# Altium PCB Bellerophon.PcbDoc
Units mil, origin at the board's own origin, x right, y up, seen from the top; angles counter-clockwise.
Board outline 2775.59 x 7893.7 mil, 2 copper layers (Top Layer, Bottom Layer); 34 components, 13 nets, 125 pads, 8 vias.
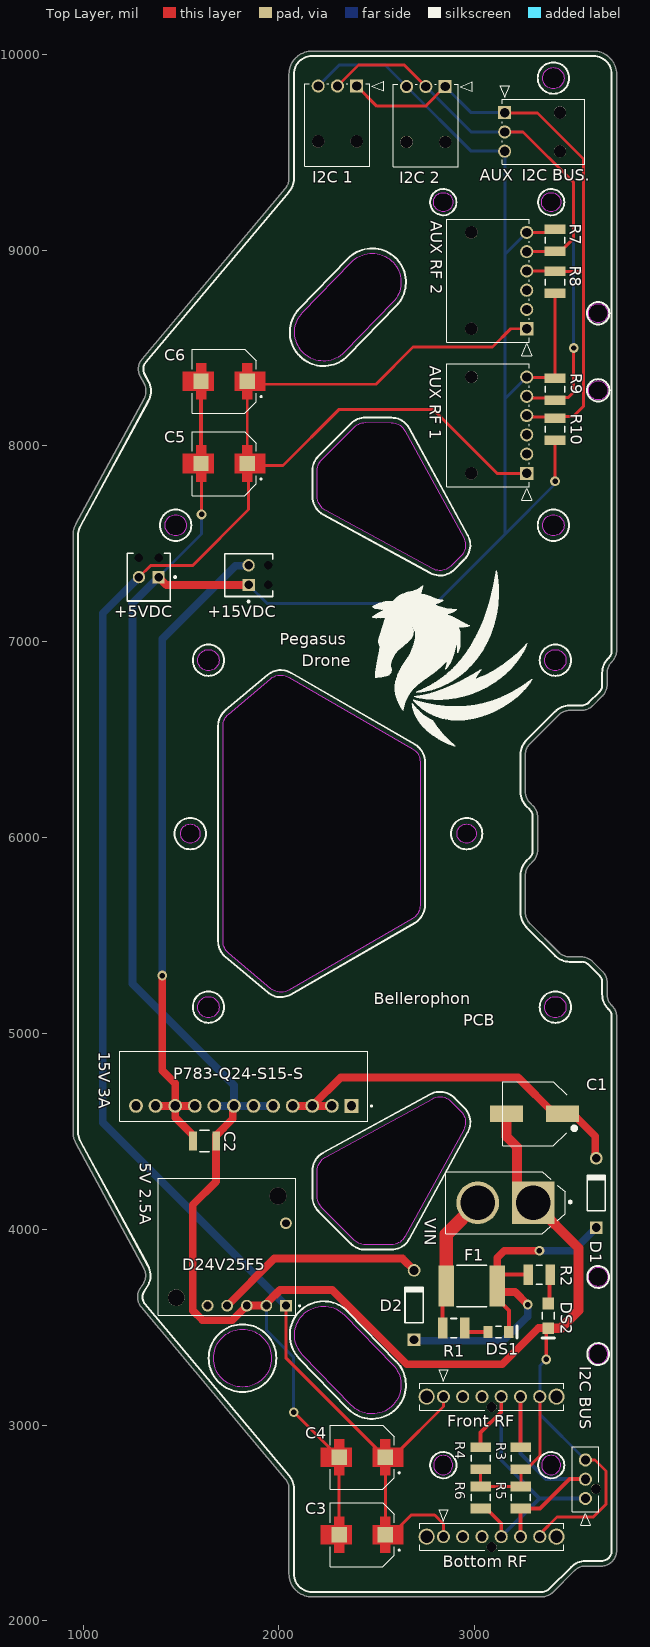
[diagram p0: Top Layer view]
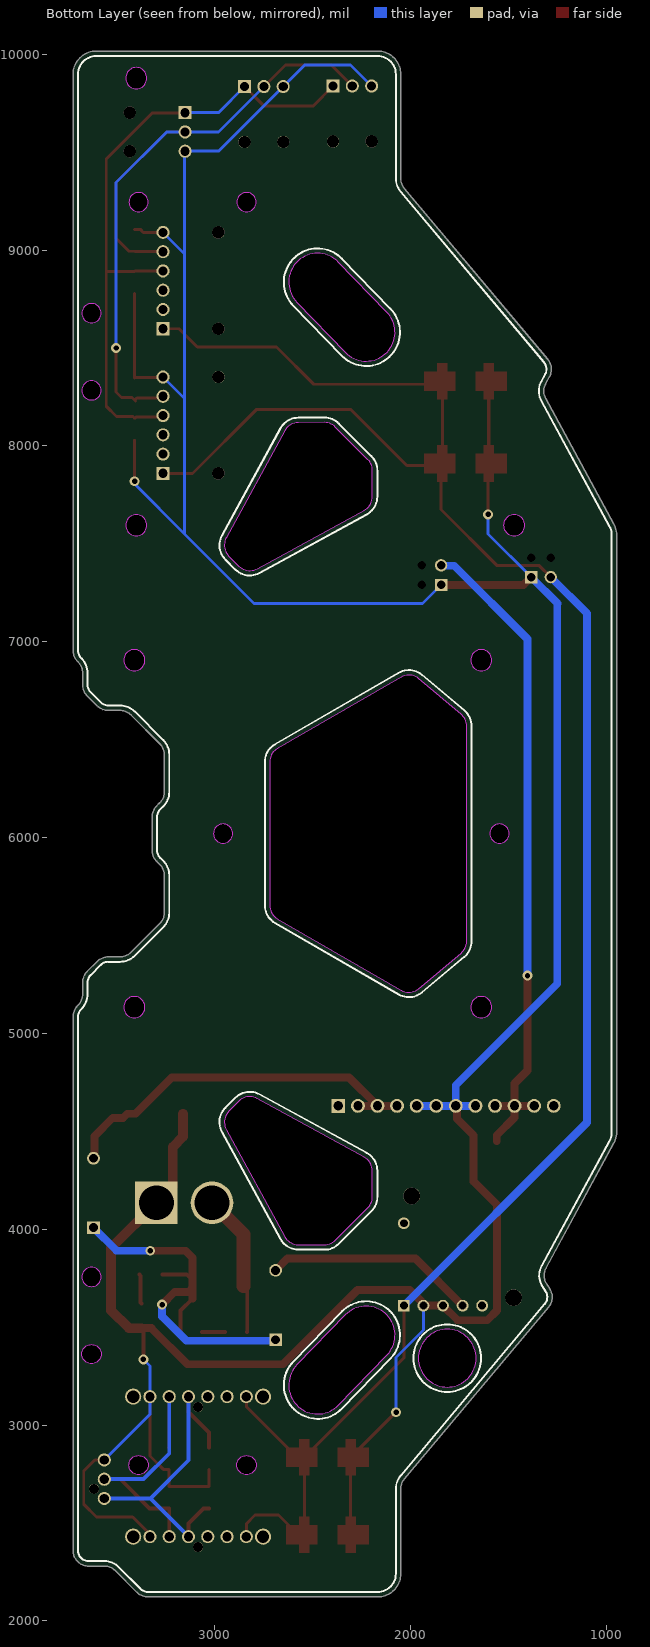
[diagram p1: Bottom Layer view, seen from below]

## Layer stack, top to bottom
Top Solder: solder mask 1, Solder Resist, Dk 3.5
Top Layer: signal copper 1.378
Dielectric 1: dielectric 12.6, FR-4, Dk 4.8
Bottom Layer: signal copper 1.378
Bottom Solder: solder mask 1, Solder Resist, Dk 3.5

## Board outline
1296.01,3602.82 cw(c1356.33,3653.44) 1290.29,3696.32 1306.14,3720.73 ccw(c1240.11,3763.62) 1309.3,3801.19 962.98,4439.04 cw(c1066.78,4495.4) 948.67,4495.4 948.67,7544.64 cw(c1066.78,7544.64) 962.98,7601 1311.26,8242.45 ccw(c1242.06,8280.02) 1311.26,8317.59 1291.41,8354.14 cw(c1360.61,8391.71) 1300.29,8442.33 2032.61,9315.06 ccw(c1972.29,9365.68) 2051.03,9365.68 2051.03,9897.97 cw(c2169.14,9897.97) 2169.14,10016.08 3606.15,10016.08 cw(c3606.15,9897.97) 3724.26,9897.97 3724.26,6954.6 cw(c3645.52,6954.6) 3701.19,6898.93 3698.89,6896.63 ccw(c3754.57,6840.95) 3675.83,6840.95 3675.83,6780.2 cw(c3597.09,6780.2) 3652.77,6724.52 3600.47,6672.22 cw(c3544.79,6727.9) 3544.79,6649.15 3484.04,6649.15 ccw(c3484.04,6570.42) 3428.36,6626.09 3281.57,6479.3 ccw(c3337.25,6423.63) 3258.51,6423.63 3258.51,6232.95 ccw(c3337.25,6232.95) 3281.57,6177.27 3297.65,6161.19 cw(c3241.97,6105.52) 3320.71,6105.52 3320.71,5934.53 cw(c3241.97,5934.53) 3297.65,5878.85 3281.57,5862.77 ccw(c3337.25,5807.09) 3258.51,5807.09 3258.51,5616.42 ccw(c3337.25,5616.42) 3281.57,5560.74 3428.36,5413.95 ccw(c3484.04,5469.63) 3484.04,5390.89 3544.79,5390.89 cw(c3544.79,5312.15) 3600.47,5367.82 3652.77,5315.52 cw(c3597.09,5259.85) 3675.83,5259.85 3675.83,5199.09 ccw(c3754.57,5199.09) 3698.89,5143.42 3701.19,5141.11 cw(c3645.52,5085.44) 3724.26,5085.44 3724.26,2358.6 cw(c3645.52,2358.6) 3645.52,2279.86 3564.94,2279.86 ccw(c3564.94,2201.12) 3509.27,2256.8 3397.91,2145.45 cw(c3342.23,2201.12) 3342.23,2122.38 2169.14,2122.38 cw(c2169.14,2240.49) 2051.03,2240.49 2051.03,2674.37 ccw(c1972.29,2674.37) 2032.61,2724.98
cut-out: 2789.52,2795.44 ccw(c2838.73,2795.44) 2838.73,2746.23 ccw(c2838.73,2795.44) 2887.94,2795.44 ccw(c2838.73,2795.44) 2838.73,2844.66 ccw(c2838.73,2795.44)
cut-out: 3340.7,2795.44 ccw(c3389.91,2795.44) 3389.91,2746.23 ccw(c3389.91,2795.44) 3439.12,2795.44 ccw(c3389.91,2795.44) 3389.91,2844.66 ccw(c3389.91,2795.44)
cut-out: 3411.46,5080.06 cw(c3411.46,5134.19) 3357.33,5134.19 cw(c3411.46,5134.19) 3411.46,5188.33 cw(c3411.46,5134.19) 3465.6,5134.19 cw(c3411.46,5134.19)
cut-out: 1639.81,5080.06 cw(c1639.81,5134.19) 1585.68,5134.19 cw(c1639.81,5134.19) 1639.81,5188.33 cw(c1639.81,5134.19) 1693.94,5134.19 cw(c1639.81,5134.19)
cut-out: 1546.91,5970.81 cw(c1546.91,6020.02) 1497.7,6020.02 cw(c1546.91,6020.02) 1546.91,6069.23 cw(c1546.91,6020.02) 1596.12,6020.02 cw(c1546.91,6020.02)
cut-out: 2958.38,5970.81 cw(c2958.38,6020.02) 2909.16,6020.02 cw(c2958.38,6020.02) 2958.38,6069.23 cw(c2958.38,6020.02) 3007.59,6020.02 cw(c2958.38,6020.02)
cut-out: 1639.81,6851.71 cw(c1639.81,6905.85) 1585.68,6905.85 cw(c1639.81,6905.85) 1639.81,6959.98 cw(c1639.81,6905.85) 1693.94,6905.85 cw(c1639.81,6905.85)
cut-out: 1472.29,7540.69 cw(c1472.29,7594.82) 1418.16,7594.82 cw(c1472.29,7594.82) 1472.29,7648.96 cw(c1472.29,7594.82) 1526.43,7594.82 cw(c1472.29,7594.82)
cut-out: 3411.46,6851.71 cw(c3411.46,6905.85) 3357.33,6905.85 cw(c3411.46,6905.85) 3411.46,6959.98 cw(c3411.46,6905.85) 3465.6,6905.85 cw(c3411.46,6905.85)
cut-out: 3401.43,7540.69 cw(c3401.43,7594.82) 3347.29,7594.82 cw(c3401.43,7594.82) 3401.43,7648.96 cw(c3401.43,7594.82) 3455.56,7594.82 cw(c3401.43,7594.82)
cut-out: 3630.17,8234.59 cw(c3630.17,8283.8) 3580.95,8283.8 cw(c3630.17,8283.8) 3630.17,8333.01 cw(c3630.17,8283.8) 3679.38,8283.8 cw(c3630.17,8283.8)
cut-out: 3630.17,8628.29 cw(c3630.17,8677.5) 3580.95,8677.5 cw(c3630.17,8677.5) 3630.17,8726.72 cw(c3630.17,8677.5) 3679.38,8677.5 cw(c3630.17,8677.5)
cut-out: 2838.73,9195.39 cw(c2838.73,9244.6) 2789.52,9244.6 cw(c2838.73,9244.6) 2838.73,9293.81 cw(c2838.73,9244.6) 2887.94,9244.6 cw(c2838.73,9244.6)
cut-out: 3389.91,9195.39 cw(c3389.91,9244.6) 3340.7,9244.6 cw(c3389.91,9244.6) 3389.91,9293.81 cw(c3389.91,9244.6) 3439.12,9244.6 cw(c3389.91,9244.6)
cut-out: 3401.43,9824.15 cw(c3401.43,9878.29) 3347.29,9878.29 cw(c3401.43,9878.29) 3401.43,9932.42 cw(c3401.43,9878.29) 3455.56,9878.29 cw(c3401.43,9878.29)
cut-out: 2218.64,4109.98 cw(c2274.32,4165.66) 2195.58,4165.9 2195.99,4299.18 cw(c2274.73,4298.94) 2236.95,4368.03 2784.04,4667.17 cw(c2821.82,4598.09) 2877.5,4653.76 2928.87,4602.39 cw(c2873.19,4546.72) 2942.27,4508.94 2643.13,3961.85 cw(c2574.04,3999.63) 2574.29,3920.89 2441,3920.48 cw(c2440.76,3999.22) 2385.08,3943.54
cut-out: 2195.99,7740.86 2195.58,7874.14 cw(c2274.32,7874.38) 2218.64,7930.06 2385.08,8096.5 cw(c2440.76,8040.82) 2441,8119.56 2574.29,8119.16 cw(c2574.04,8040.42) 2643.13,8078.19 2942.27,7531.1 cw(c2873.19,7493.33) 2928.87,7437.65 2877.5,7386.28 cw(c2821.82,7441.96) 2784.04,7372.87 2236.95,7672.01 cw(c2274.73,7741.1)
cut-out: 1742.6,5409.78 cw(c1793.22,5470.1) 1714.48,5470.1 1714.48,6569.94 cw(c1793.22,6569.94) 1742.6,6630.26 1958.75,6811.63 cw(c2009.37,6751.31) 2048.74,6819.5 2680.95,6454.5 cw(c2641.58,6386.31) 2720.32,6386.31 2720.32,5653.74 cw(c2641.58,5653.74) 2680.95,5585.55 2048.74,5220.54 cw(c2009.37,5288.73) 1958.75,5228.41
cut-out: 3580.95,3362.54 ccw(c3630.17,3362.54) 3630.17,3313.33 ccw(c3630.17,3362.54) 3679.38,3362.54 ccw(c3630.17,3362.54) 3630.17,3411.75 ccw(c3630.17,3362.54)
cut-out: 3630.17,3707.03 cw(c3630.17,3756.24) 3580.95,3756.24 cw(c3630.17,3756.24) 3630.17,3805.45 cw(c3630.17,3756.24) 3679.38,3756.24 cw(c3630.17,3756.24)
cut-out: 2369.51,3101.42 2121.92,3356.72 cw(c2227.91,3459.51) 2333.89,3562.29 2581.48,3306.99 cw(c2475.5,3204.21)
cut-out: 1813.71,3193.9 cw(c1813.71,3341.54) 1666.07,3341.54 cw(c1813.71,3341.54) 1813.71,3489.17 cw(c1813.71,3341.54) 1961.34,3341.54 cw(c1813.71,3341.54)
cut-out: 2333.89,8477.75 cw(c2227.91,8580.54) 2121.92,8683.32 2369.51,8938.62 cw(c2475.5,8835.84) 2581.48,8733.05

## Design rules (kind name [scope] priority, off if disabled: settings)
Clearance [All] p1: gap=6 ignorepadtopadclearanceinfootprint=FALSE
PolygonConnect [All] p1: connectstyle=Relief reliefconductorwidth=10 reliefentries=4 polygonreliefangle="90 Angle" airgapwidth=10
RoomDefinition Bellerophon [InComponentClass('Bellerophon')] p1: confinementstyle=ConfineIn formatcopy=TRUE lockcomponents=FALSE outline 3770,2180 4180,2180 4180,2515 3770,2515
RoutingVias [All] p1: holewidth=28 width=50 viastyle="Through Hole" minholewidth=28 minwidth=50 maxholewidth=28 maxwidth=50
SolderMaskExpansion [All] p1: expansion=4 istentingtop=FALSE
Width [All] p1: maxlimit=80 minlimit=6 preferedwidth=20 minimp=50.000000 maximp=50.000000 favimp=50.000000
30 further rules are at their usual default settings.

## Components (designator, comment, footprint, x,y, rotation, side; value= is the part's Value field where it differs from the comment)
"5V 2.5A" "D24V25F5" XDCR_12V_2.2A_STEP-DOWN_D24V22F12 1735,3910 r180 top
"15V 3A" "P783-Q24-S15-S" CONV_P783-Q24-S15-S 1820,4730.2 r180 top
+5VDC "Screw Terminal 2" PHOE-1725656-2 1335,7330 r180 top
+15VDC "Screw Terminal 1" PHOE-1725656-2 1845,7340 r90 top
"AUX RF 1" "1053131306" CON_1053131306 3265,7859.72 r270 top
"AUX RF 2" "1053131306" CON_1053131306 3265,8598.15 r270 top
"Bottom RF" "1053111306" CON_1053111306_MOL 2839.72,2430 r0 top
C1 "100μF/50V" CAPAE830X1020N 3305,4590 r180 top
C2 "22μF/25V" FP-1210-L_3_3_0_4-W_2_5_0-MFG 1620,4450 r0 top
C3 "EEEFN0J681V" CAP_EEEFN0J681V 2425,2440 r180 top
C4 "EEEFN0J681V" CAP_EEEFN0J681V 2425,2835 r180 top
C5 "EEEFN0J681V" CAP_EEEFN0J681V 1720,7910 r180 top
C6 "EEEFN0J681V" CAP_EEEFN0J681V 1720,8330 r180 top
D1 "1N4001-T" DIOD-DO-41-P-2_V 3620,4185 r90 top
D2 "1N4001-T" DIOD-DO-41-P-2_V 2690,3612.83 r90 top
DS1 "SML-LX1206IC-TR" LUMX-SML-LX1206IC_V 3120,3475 r0 top
DS2 "SML-LX1206GC-TR" LUMX-SML-LX1206GC-TR_V 3375,3557.68 r270 top
F1 "2920L300/15DR" FP-2920L-MFG 2984.55,3710 r0 top value=0.015-0.048Ω
"Front RF" "1053111306" CON_1053111306_MOL 2839.72,3145 r0 top
"I2C 1" "1053131303" CON_1053131303 2396.85,9837.68 r0 top (schematic designator "AUX I2C 1")
"I2C 2" "1053131303" CON_1053131303 2848.43,9835 r0 top (schematic designator "AUX I2C 2")
"I2C BUS" "1053091303" CON_1053091303 3565,2625 r90 top
"I2C BUS." "1053131303" CON_1053131303 3152.32,9701.85 r90 top
R1 "1K" RESC3225X70X50NL20T20 2892.09,3494.75 r0 top
R2 "1K" RESC3225X70X50NL20T20 3329.66,3767.81 r0 top
R3 "4.7k" RESC3225X70X50NL20T20 3235,2830 r270 top
R4 "4.7k" RESC3225X70X50NL20T20 3030,2830 r270 top
R5 "4.7k" RESC3225X70X50NL20T20 3235,2630 r90 top
R6 "4.7k" RESC3225X70X50NL20T20 3030,2630 r90 top
R7 "4.7k" RESC3225X70X50NL20T20 3410,9050 r90 top
R8 "4.7k" RESC3225X70X50NL20T20 3410,8835 r270 top
R9 "4.7k" RESC3225X70X50NL20T20 3410,8290 r90 top
R10 "4.7k" RESC3225X70X50NL20T20 3410,8085 r270 top
VIN "XT60-M" AMASS_XT60-M 3156.73,4135 r180 top

## Footprints (in the part's own frame and the unit in brackets; to place one, negate y for a bottom-side part, rotate by r counter-clockwise, add the part's x,y. Pads: shape width x height; smd on the part's side, far side on the other; paste and mask are expansions set on the pad)
AMASS_XT60-M [mm]
  rect 5.516x5.516 hole 4.5: 1(-3.6,0)
  round 5.516 hole 4.5: 2(3.6,0)
  silkscreen extent -8.55,-4.05 7.75,4.05
CAP_EEEFN0J681V [mm]
  rect 2x2 smd paste-2 mask+0: 1(-3,0) 2(3,0)
  Top Layer region: -2.35,1.25 -1.35,1.25 -1.35,-1.25 -2.35,-1.25 -2.35,-2.35 -3.65,-2.35 -3.65,-1.25 -5.35,-1.25 -5.35,1.25 -3.65,1.25 -3.65,2.35 -2.35,2.35
  Top Layer region: 3.65,1.25 5.35,1.25 5.35,-1.25 3.65,-1.25 3.65,-2.35 2.35,-2.35 2.35,-1.25 1.35,-1.25 1.35,1.25 2.35,1.25 2.35,2.35 3.65,2.35
  silkscreen extent -4.9,-4.15 4.15,4.15, body extent -4.85,-4.15 4.85,4.15, height 10.5
CAPAE830X1020N [mm]
  rect 4.25x2.1 smd: 1(-3.62,0) 2(3.62,0)
  silkscreen extent -5.44,-4.15 4.15,4.15
CON_1053091303 [mm]
  round 1.7 hole 1.2 mask+0.076: 1(0,0) 2(2.5,0) 3(5,0)
  round 1.3 hole 1.3 unplated mask+0.076: 4(1.25,-1.34)
  silkscreen extent -3.5,-1.74 6.72,1.74, body extent 0,0 0.25,0.25, height 0.25
CON_1053111306_MOL [mm]
  round 1.7 hole 1.2 mask+0.076: 1(0,0) 2(2.5,0) 3(5,0) 4(7.5,0) 5(10,0) 6(12.5,0)
  round 1.3 hole 1.3 unplated mask+0.076: 9(6.25,-1.34)
  round 2.1 hole 1.6 mask+0.076: P1(-2.17,0) P2(14.67,0)
  silkscreen extent -3.08,-1.74 15.58,3.52, body extent 0,0 0.25,0.25, height 0.25
CON_1053131303 [mm]
  rect 1.7x1.7 hole 1.2 mask+0.076: 1(0,0)
  round 1.7 hole 1.2 mask+0.076: 2(-2.5,0) 3(-5,0)
  round 1.6 hole 1.6 unplated mask+0.076: 4(0,-7.18) 5(-5,-7.18)
  silkscreen extent -6.72,-10.38 3.5,0.64, body extent 0,0 0.25,0.25, height 0.25
CON_1053131306 [mm]
  rect 1.7x1.7 hole 1.2 mask+0.076: 1(0,0)
  round 1.7 hole 1.2 mask+0.076: 2(-2.5,0) 3(-5,0) 4(-7.5,0) 5(-10,0) 6(-12.5,0)
  round 1.6 hole 1.6 unplated mask+0.076: 7(0,-7.18) 8(-12.5,-7.18)
  silkscreen extent -14.22,-10.38 3.5,0.64, body extent 0,0 0.25,0.25, height 0.25
CONV_P783-Q24-S15-S [mm]
  rect 1.8x1.8 hole 1.2: 1(-13.97,2.545)
  round 1.8 hole 1.2: 2(-11.43,2.545) 3(-8.89,2.545) 4(-6.35,2.545) 5(-3.81,2.545) 6(-1.27,2.545) 7(1.27,2.545) 8(3.81,2.545) 9(6.35,2.545) 10(8.89,2.545) 11(11.43,2.545) 12(13.97,2.545)
  silkscreen extent -16.68,-4.52 16.07,4.52
DIOD-DO-41-P-2_V [mm] "2-Leads, Axial Lead, Body 4.635x2.36mm, Pin Spacing 9mm"
  rect 1.65x1.65 hole 1.15: 1(-4.5,0)
  round 1.65 hole 1.15: 2(4.5,0)
  silkscreen extent -2.32,-1.18 2.32,1.18, body extent -4.93,-1.18 4.93,1.18, height 2.35
FP-1210-L_3_3_0_4-W_2_5_0-MFG [mm]
  rect 1x2.5 smd paste+0 mask+0: 1(-1.5,0) 2(1.5,0)
  silkscreen extent -0.62,-1.4 0.62,1.4, body extent -2.1,-1.5 2.1,1.5, height 0.25
FP-2920L-MFG [mm]
  rect 2x5.3 smd paste+0 mask+0: 1(-3.3,0) 2(3.3,0)
  silkscreen extent -1.92,-2.72 1.92,2.72, body extent -4.4,-2.82 4.4,2.82, height 0.25
LUMX-SML-LX1206GC-TR_V [mm] "SMD, 2-Leads, Body 3.2x1.6mm"
  rect 1.5x1.5 smd: 1(-1.6,0) 2(1.6,0)
  silkscreen extent -0.45,-0.8 2.85,0.8, body extent -1.6,-0.8 1.6,0.8, height 1.1
LUMX-SML-LX1206IC_V [mm] "SMD, 2-Leads, Body 3.2x1.5mm"
  rect 1.2x1.5 smd: 1(-1.35,0) 2(1.35,0)
  silkscreen extent -0.35,-0.75 2.45,0.75, body extent -1.6,-0.8 1.6,0.8, height 1.1
PHOE-1725656-2 [mm] "Connector, 2-Leads, Body 6.2x5.4mm, Pitch 2.54mm"
  rect 1.6x1.6 hole 1.1: 1(-1.27,0)
  round 1.6 hole 1.1: 2(1.27,0)
  round 0 hole 1.1 unplated: MH1(-1.27,-2.54) MH2(1.27,-2.54)
  silkscreen extent -3.55,-3.1 2.77,3.1, body extent -2.77,-3.1 2.77,3.1, height 9
RESC3225X70X50NL20T20 [mm] "Chip Resistor, 2-Leads, Body 3.20x2.50mm, IPC Medium Density"
  rect 1.25x2.7 smd: 1(-1.425,0) 2(1.425,0)
  silkscreen extent -0.4,-1.25 0.4,1.25, body extent -1.7,-1.35 1.7,1.35, height 0.7
XDCR_12V_2.2A_STEP-DOWN_D24V22F12 [mm]
  rect 1.53x1.53 hole 1.02: 1(-7.63,7.63)
  round 1.53 hole 1.02: 2(-5.09,7.63) 3(-2.55,7.63) 4(-0.01,7.63) 5(2.53,7.63) 6(-7.63,-3.06)
  round 2.18 hole 2.18 unplated: ""(-6.6,-6.6) ""(6.6,6.6)
  silkscreen extent -9.5,-8.9 8.9,8.9

## Part data
"5V 2.5A": library part 12V_2.2A_STEP-DOWN_D24V22F12, "Converter: step down; Uin: 12.7Ã·36V; Uout: 12V; 2200mA; 90Ã·95%", Package=None, Availability=Unavailable, MF=Pololu, MP="12V 2.2A STEP-DOWN D24V22F12", Price=None, SnapEDA_Link=https://www.snapeda.com/parts/12V%202.2A%20STEP-DOWN%20D24V22F12/Pololu/view-part/1771637/?ref=snap
"15V 3A": Package=None, Availability=Unavailable, MP=P783-Q24-S15-S, Price=None
+5VDC +15VDC: library part CMP-2000-05299-1, "Male Header, Pitch 2.54 mm, 1 x 2 Position, Height 9 mm, Tail Length 3.5 mm", Colour=Green, Manufacturer="Phoenix Contact", Manufacturer part No.=1725656, Content=250pc(s), Datasheet URL=http://datasheet.octopart.com/1725656-Phoenix-Contact-datasheet-5302866.pdf, Datasheet Version=Apr-08, Industrial packaging=Yes, Manufacturer URL=http://www.phoenixcontact.com/, Number of contacts=2, Pitch=2.54mm, Type=MPT0,5/2-2,54
"AUX RF 1" "AUX RF 2" "Bottom RF" "Front RF" "I2C 1" "I2C 2" "I2C BUS" "I2C BUS.": "No Description Available", Mfr_Name="Molex Connector Corporation", Copyright="Copyright (C) 2022 Ultra Librarian. All rights reserved.", RefDes=RefDes, Type=DEV
  "AUX RF 1" "AUX RF 2": Digi-Key_Part_Number_1=WM15145-ND, Manufacturer_Part_Number=1053131306
  "Bottom RF" "Front RF": Digi-Key_Part_Number_1=WM15093-ND, Manufacturer_Part_Number=1053111306
  "I2C 1" "I2C 2" "I2C BUS.": Digi-Key_Part_Number_1=WM15142-ND, Manufacturer_Part_Number=1053131303
  "I2C BUS": Digi-Key_Part_Number_1=WM15037-ND, Manufacturer_Part_Number=1053091303
C1: library part EDK107M050A9MAA, "100ÂµF 50V Aluminum Electrolytic Capacitors Radial, Can - SMD 2000 Hrs @ 85Â°C", Package="Radial Kemet", Availability=Unavailable, MF=KEMET, MP=EDK107M050A9MAA, Price=None, SnapEDA_Link=https://www.snapeda.com/parts/EDK107M050A9MAA/KEMET/view-part/285947/?ref=snap
C2: library part CMP-2000-05483-2, "General Purpose Ceramic Capacitor, 1210, 22uF, 10%, X5R, 15%, 16V", Capacitance=22uF, Case Code (Imperial)=1210, Case Code (Metric)=3225, Dielectric=X5R, Max Operating Temperature=85°C, Min Operating Temperature=-55°C, Package Quantity=1, Tolerance=10%, Voltage=16V, Case/Package=1210, Construction=Flat, Contact Plating=Tin, Depth=2.5mm, Height=2.79mm, Lead Free="Lead Free", Length=3.2mm, Mount="Surface Mount", Number of Pins=2, Packaging="Tape and Reel", Radiation Hardening=No, REACH SVHC="No SVHC", RoHS Compliant=Yes, Series=-, Size=2.79mm, Termination=SMD/SMT, Thickness=0.11inch, Voltage Rating=16V, Voltage Rating (DC)=16V, Weight=0.000564oz, Width=0.098inch
C3 C4: Package=CAP_EEEFN0J681V, DeviceSetName=EEEFN0J681V, Digi-Key_Part_Number=10-EEE-FN0J681VCT-ND, GateName_1=G$1, LibraryName=EEEFN0J681V, MF=Panasonic, MP=EEEFN0J681V, Purchase-URL=https://pricing.snapeda.com/search/part/EEEFN0J681V/?ref=eda, SymbolName_1=EEEFN0J681V
C5 C6: "CAP ALUM 680UF 20% 6.3V SMD", Package="RADIAL-2 Panasonic", Availability="In Stock", Check_prices=https://www.snapeda.com/parts/EEEFN0J681V/Panasonic/view-part/?ref=eda, MF=Panasonic, MP=EEEFN0J681V, Price=None, Purchase-URL=https://pricing.snapeda.com/search/part/EEEFN0J681V/?ref=eda, SnapEDA_Link=https://www.snapeda.com/parts/EEEFN0J681V/Panasonic/view-part/?ref=snap
D1 D2: library part CMP-0639-00006-2, "1.0 A Rectifier, 15 pF, 50 V, -65 to 150 degC, 2-Pin DO-41 Plastic, RoHS, Tape and Reel", Manufacturer="Diodes Inc", Max. Average Rectified Current IO (A)=1, Operating Temperature Range (degC)="-65 to 150", ComponentLink1Description="Manufacturer URL", ComponentLink1URL=http://diodes.com/, ComponentLink2Description=Datasheet, ComponentLink2URL=http://diodes.com/datasheets/ds28002.pdf, CT (pF)=15, DatasheetVersion="Rev. 8-2", Max. IFSM (A)=30, Max. IR (uA)=5, Mounting Technology="Through Hole", PackageDescription="2-Pin Axial Lead, Body 4.635 x 2.36 mm, Lead Spread 25.4 mm", PackageReference=DO-41-P-2, Packing="Tape and Reel", PartNumber=1N4001-T, RoHS=TRUE, VF (V)=1, VRRM (V)=50
DS1: library part CMP-2000-07123-1, "LED Red, 65 mW, -40 to 85 degC, 2-Pin SMD, RoHS, Tape and Reel", Color=Red, Manufacturer=Lumex, Operating Temperature=-25to85C, Package Description="2-Pin Surface Mount Device, Body 3.2 x 1.5 mm", Package Reference=SML-LX1206IC, Reverse Voltage=5(Min)V, Supplier_Package=SMD, Datasheet URL=http://www.lumex.com/content/files/ProductAttachment/SML-LX1206IC-TR.pdf, Datasheet Version="Rev. J, 08/2012", Dimension=3.2x1.6x1.1mm, Dominant Wavelength=N/A, ECCN=EAR99, Family=SML-LX1206IC, HTS=8541402000, Intensity=6mcd, LED Material=GaAsP, Lens Appearance=ColorlessNonDiffused, Lens Dimensions=2x1.6x0.5mm, Manufacturer URL=http://www.lumexinstruments.com/, Mounting=SurfaceMount, Mounting Technology=SurfaceMount, Number of LEDs=1, Packaging=TapeandReel, Part No=SML-LX1206IC-TR, Peak Wavelength=635nm, Pin_Count=2, RoHS=Unknown, Supplier=Lumex, Supplier Standard Pack=3,000, Type=Uni-Color, Viewing Angle=160
DS2: library part CMP-2000-07122-1, "Green Led, Water Clear Lens, 10 mcd, 565 nm, 2.2 V, -40 to 85 degC, 2-Pin SMD, RoHS, Tape and Reel", Color=Green, Manufacturer=Lumex, Operating Temperature=-40to85C, Package Description="2-Pin Surface Mount Device, Body 3.2 x 1.6 mm", Reverse Voltage=5(Min)V, Supplier_Package=SMD, COO=CN, Datasheet URL=http://www.mouser.com/ds/2/244/SML-LX1206GC-TR-112732.pdf, Datasheet Version="Rev. J, 04/2011", Dimension=3.2x1.6x1.1mm, Dominant Wavelength=N/A, ECCN=EAR99, Family=SML-LX1206GC, HTS=8541402000, Intensity=10mcd, LED Material=GaP, Lens Appearance=ColorlessNonDiffused, Lens Dimensions=2x1.6x0.5mm, Manufacturer URL=http://www.lumexinstruments.com/, Mounting=SurfaceMount, Mounting Technology=SurfaceMount, Number of LEDs=1, Package Reference=SML-LX1206GC-TR, Packaging=TapeandReel, Part No=SML-LX1206GC-TR, Peak Wavelength=565nm, Pin_Count=2, RoHS=Yes, Supplier=Lumex, Supplier Standard Pack=3,000, Type=Uni-Color, Viewing Angle=160
F1: library part CMP-2000-05550-2, "PTC RESET FUSE 15V 3A 2920", Ambient Temperature Range High=+85°C, Ambient Temperature Range Low=-40°C, Current Rating=40A, Hold Current=3A, Manufacturer=Littelfuse, Package=2920L, Resistance=0.015-0.048Ω, Temperature="-40°C to +85°C", Trip Current=5A, Voltage Rating=15V, Automotive=No, Category=Fuse, ComponentLink2Description=Datasheet, ComponentLink2URL=https://m.littelfuse.com/~/media/electronics/datasheets/resettable_ptcs/littelfuse_ptc_2920l_datasheet.pdf.pdf, Device Class L1="Circuit Protection", Device Class L2="PTC Resettable Fuses", Device Class L3=unset, Digikey Description="PTC RESET FUSE 15V 3A 2920", Height=1.25mm, Lead Free=Yes, Manufacturer Part Number=2920L300/15DR, Octopart=https://octopart.com/2920l300%2F15dr-littelfuse-673797, RoHS=TRUE, Temperature Range High=+85°C, Temperature Range Low=-40°C, Trip Time=20s
R1 R2 R3 R4 R5 R6 R7 R8 R9 R10: library part CMP-2005-03583-1, Manufacturer=Panasonic, Part Number=ERJ-14YJ472U
VIN: "Plug; DC supply; XT60; male; PIN: 2; for cable; soldered; 30A; 500V", Package="Package Analog Devices", Availability=Unavailable, MF=AMASS, MP=XT60-M, Price=None, SnapEDA_Link=https://www.snapeda.com/parts/XT60-M/AMASS/view-part/2883912/?ref=snap

## Via types
v1: diameter 50, hole 28, Top Layer to Bottom Layer, 8 vias

## Nets (pads, with @x,y where several pads share a name; then routed paths per layer and width w, separated by ;. In a path a pad name is that pad's centre, name@x,y a point inside that pad or via, vN(x,y) a via of type N, cw(c..) or ccw(c..) an arc to the next point about the centre after c; other vN are vias at no path point)
+5V: "5V 2.5A.1" "AUX RF 1.1" "AUX RF 2.1" "Bottom RF.1" "Front RF.1" +5VDC.2 C3.1 C4.1 C5.1 C6.1 | length 11000.6
  Top Layer w15: +5VDC.2 1343.35,7388.35 1558.35,7388.35 1845,7675 1845,7893.11 1838.11,7900 2020,7900 2305,8185 2789.29,8185 3114.57,7859.72 3265,7859.72 ; C5.1 1838.11,8315 2495,8315 2685,8505 3090,8505 3183.15,8598.15 3265,8598.15 ; 2035.39,3609.61 2035,3609.21 2035,3343.11 C4.1 ; 2839.72,2430 2839.72,2495.28 2795,2540 2675,2540 2596.19,2461.19 2564.3,2461.19 C3.1 C4.1 ; 2839.72,3145 2839.72,3094.72 2596.19,2851.19 2559.3,2851.19 C4.1
  Bottom Layer w40: +5VDC.2 1100,7145 1100,4545 2035.39,3609.61
+15V: "15V 3A.9" "15V 3A.10" "15V 3A.11" +15VDC.2 C2.1 | length 3430
  Top Layer w20: +15VDC.2@1842.5,7392.5 +15VDC.2
  Top Layer w40: 1370,4630 1470,4630 ; v1(1403.89,5295) 1403.89,4810 1470,4743.89 1470,4630 ; C2.1 1560.95,4479.06 1470,4570 1470,4630 ; 1570,4630 1470,4630
  Bottom Layer w40: v1(1403.89,5295) v1@1405.28,5296.39 ; v1@1403.89,5296.39 1403.89,6946.81 1403.89,7013.89 1777.8,7387.8 1842.8,7387.8 +15VDC.2
+22V: D1.1 D2.1 DS1.2 F1.2 R2.1 | length 2022.4
  Top Layer w20: F1.2@3114.47,3645.04 3175,3584.51 DS1.2@3175,3475 ; F1.2@3114.47,3738.44 3143.84,3767.81 R2.1@3268.9,3767.81
  Top Layer w40: F1.2@3114.47,3645.04 F1.2@3114.47,3699.37 ; v1(3270,3615) 3205,3680 3133.84,3680 F1.2@3114.47,3699.37 ; v1(3330,3890) 3150,3890 3114.47,3854.47 3114.47,3738.44 F1.2 F1.2@3114.47,3699.37
  Bottom Layer w40: D2.1@2690,3430 3145,3430 3270,3555 v1(3270,3615) ; v1(3330,3890) 3502.17,3890 D1.1
GND: "5V 2.5A.2" "5V 2.5A.3" "15V 3A.5" "15V 3A.6" "15V 3A.7" "15V 3A.8" "AUX RF 1.6" "AUX RF 2.6" "Bottom RF.6" "Front RF.6" "I2C 1.3" "I2C 2.3" "I2C BUS.3" "I2C BUS..3" +5VDC.1 +15VDC.1 C1.2 C2.2 C3.2 C4.2 C5.2 C6.2 DS2.2 R3.2 R4.2 R5.2 R6.2 R7.2 R8.2 R9.2 R10.2 VIN.1 | length 19332.6
  Top Layer w15: v1(1605,7650) C5.2@1605,7896.89 ; v1(2075,3065) 2076.89,3065 C4.2 C3.2 ; R4.2 R6.2 R5.2 R3.2 3263.54,2773.9 3331.85,2842.2 3331.85,3145 ; 3265,8351.85 3267.87,8348.98 3407.13,8348.98 R9.2 R8.2 ; 3265,9090.28 3365.63,9090.28 3381.46,9106.1 R7.2 ; 3331.85,2430 3331.85,2441.85 3420,2530 3605,2530 3670,2595 3670,2765 3613.15,2821.85 3565,2821.85 ; v1(3410,7820) R10.2
  Top Layer w20: C6.2@1601.89,8315 1601.89,7900 C5.2@1605,7896.89 ; v1(3365,3335) 3365,3484.68 DS2.2
  Top Layer w40: +5VDC.1 1425,7290 +15VDC.1 ; 1770,4630 1764.09,4624.09 1764.09,4563.94 1679.05,4478.9 C2.2 1679.05,4244.05 1560,4125 1560,3585 1610,3535 1760.79,3535 1835.39,3609.61 1935.39,3609.61 1935.39,3615.08 1945.51,3625.2 1945.51,3630.51 2005,3690 2272.42,3690 2652.42,3310 3140,3310 3324.68,3494.68 DS2.2
  Top Layer w50: C1.2 3162.48,4472.52 3214.88,4420.12 ; 3214.88,4415 3214.88,4218.58 VIN.1 3530,3903.46 3530,3585 3439.68,3494.68 DS2.2
  Bottom Layer w15: +5VDC.1 1605,7550 v1(1605,7650) ; +15VDC.1 1940,7195 2800,7195 3155,7550 ; 1935.39,3609.61 1935.39,3484.61 2075,3345 v1(2075,3065) ; 2200,9837.68 2307.32,9945 2541.57,9945 2651.57,9835 2981.57,9505 3152.32,9505 3155,9502.32 3155,8980.28 ; 3265,8351.85 3155,8241.85 ; 3265,9090.28 3155,8980.28 ; v1(3365,3335) 3365,3334.12 3331.85,3300.97 3331.85,3145 3331.85,3055 3565,2821.85 ; v1(3410,7820) 3410,7805 3155,7550 ; 3155,7550 3155,8241.85 ; 3155,8241.85 3155,8980.28
  Bottom Layer w20: v1(3365,3335) v1@3365.14,3334.86
  Bottom Layer w40: 1250,7195 +5VDC.1 ; 1251.95,7195 1251.95,5253.05 1770,4735 1770,4630 ; 1670,4630 1770,4630 ; 1970,4630 1870,4630 1770,4630
"Net5V 2.5A_4": "5V 2.5A.4" D2.2 | length 1079
  Top Layer w40: 1735.39,3609.61 1975.79,3850 2630,3850 D2.2
"Net15V 3A_2": "15V 3A.2" "15V 3A.3" "15V 3A.4" C1.1 D1.2 | length 1944.2
  Top Layer w40: 2070,4630 2170,4630 ; 2270,4630 2170,4630 ; D1.2 3615.22,4366.94 3615.22,4474.78 3521.34,4568.66 3468.86,4568.66 C1.1 3405.2,4590 3220.2,4775 2315,4775 2170,4630
NetDS1_1: DS1.1 R1.2 | length 118.7
  Top Layer w20: R1.2@2948.19,3475 DS1.1
NetDS2_1: DS2.1 R2.2 | length 151.6
  Top Layer w20: DS2.1 3380.38,3626.05 3380.38,3762.43 R2.2
NetF1_1: F1.1 R1.1 VIN.2 | length 735
  Top Layer w20: R1.1@2835.99,3475 2835,3475.99 2835,3690.37 F1.1
  Top Layer w70: F1.1 2854.63,3974.63 VIN.2
SCL1: "Bottom RF.4" "Front RF.4" "I2C BUS.1" R4.1 R6.1 | length 1618
  Top Layer w20: R6.1 3058.54,2573.9 3135,2497.44 3135,2430 ; R4.1 3030,2961.33 3135,3066.33 3135,3145
  Bottom Layer w20: 3135,2430 3330,2625 ; 3135,3145 3135,2820 3330,2625 ; 3565,2625 3330,2625
SCL3: "AUX RF 1.4" "AUX RF 2.4" "I2C 1.1" "I2C 2.1" "I2C BUS..1" R8.1 R10.1 | length 3271.8
  Top Layer w15: 2396.85,9837.68 2499.53,9735 2748.43,9735 2848.43,9835 ; 3152.32,9701.85 3154.17,9700 3320,9700 3555,9465 3555,8895 ; 3265,8155 3271.95,8148.05 3403.05,8148.05 R10.1 3418.9,8150 3502.8,8150 3555,8202.2 3555,8895 ; 3265,8893.43 3266.16,8892.26 3408.84,8892.26 R8.1 3551.1,8891.1 3555,8895
  Bottom Layer w15: 2848.43,9835 2981.58,9701.85 3152.32,9701.85
SDA1: "Bottom RF.5" "Front RF.5" "I2C BUS.2" R3.1 R5.1 | length 1472.7
  Top Layer w20: 3233.42,2430 3233.42,2572.32 R5.1 3333.9,2573.9 3483.43,2723.43 3565,2723.43 ; 3233.43,3145 3233.43,2887.68 R3.1
  Bottom Layer w20: 3233.43,3145 3233.43,2854.05 3364.05,2723.43 3565,2723.43
SDA3: "AUX RF 1.5" "AUX RF 2.5" "I2C 1.2" "I2C 2.2" "I2C BUS..2" R7.1 R9.1 | length 3852.9
  Top Layer w15: 2298.42,9837.68 2405.75,9945 2640,9945 2750,9835 ; 3152.32,9603.42 3246.58,9603.42 3505,9345 3505,9060.35 3438.54,8993.9 R7.1 3408.98,8992.87 3266.02,8992.87 3265,8991.85 ; 3265,8253.43 3273.43,8245 3398.9,8245 R9.1 ; R9.1@3406.1,8230 3423.14,8247.04 3477.04,8247.04 3505,8275 v1(3505,8500)
  Bottom Layer w15: 2750,9835 2981.58,9603.42 3152.32,9603.42 3246.58,9603.42 3505,9345 v1(3505,8500)
pads on no net: "5V 2.5A.5" "5V 2.5A.6" "5V 2.5A." "15V 3A.1" "15V 3A.12" "AUX RF 1.2" "AUX RF 1.3" "AUX RF 1.7" "AUX RF 1.8" "AUX RF 2.2" "AUX RF 2.3" "AUX RF 2.7" "AUX RF 2.8" "Bottom RF.2" "Bottom RF.3" "Bottom RF.9" "Bottom RF.P1" "Bottom RF.P2" "Front RF.2" "Front RF.3" "Front RF.9" "Front RF.P1" "Front RF.P2" "I2C 1.4" "I2C 1.5" "I2C 2.4" "I2C 2.5" "I2C BUS.4" "I2C BUS..4" "I2C BUS..5" +5VDC.MH1 +5VDC.MH2 +15VDC.MH1 +15VDC.MH2

## Silkscreen, mask and mechanical layers (free items; w line width, h text height)
Top Overlay:
  drawing of 128 lines, arcs and shapes, not listed
  text "AUX" at 3025.05,9355 h60
  text "Pegasus" at 2005,6984.99 h60
  text "Drone" at 2115.09,6875 h60
  text "Bellerophon" at 2485,5149.99 h60
  text "PCB" at 2940.05,5040 h60
Bottom Overlay:
  circle w10: c1813.71,3341.54 r172.64
  lines w10: 973.86,4495.4 ccw(c1066.78,4495.4) 985.12,4451.06 1331.45,3813.21 cw(c1240.11,3763.62) 1327.27,3707.01 1311.42,3682.6 ccw(c1356.33,3653.44) 1315.31,3619.02 2051.91,2741.18 cw(c1972.29,2674.37) 2076.23,2674.37 2076.23,2240.49 ccw(c2169.14,2240.49) 2169.14,2147.58 3342.23,2147.58 ccw(c3342.23,2201.12) 3380.09,2163.26 3491.45,2274.62 cw(c3564.94,2201.12) 3564.94,2305.06 3645.52,2305.06 ccw(c3645.52,2358.6) 3699.06,2358.6 3699.06,5085.44 ccw(c3645.52,5085.44) 3683.38,5123.3 3681.08,5125.6 cw(c3754.57,5199.09) 3650.63,5199.09 3650.63,5259.85 ccw(c3597.09,5259.85) 3634.95,5297.71 3582.65,5350.01 ccw(c3544.79,5312.15) 3544.79,5365.69 3484.04,5365.69 cw(c3484.04,5469.63) 3410.54,5396.13 3263.75,5542.92 cw(c3337.25,5616.42) 3233.31,5616.42 3233.31,5807.09 cw(c3337.25,5807.09) 3263.75,5880.59 3279.83,5896.67 ccw(c3241.97,5934.53) 3295.52,5934.53 3295.52,6105.52 ccw(c3241.97,6105.52) 3279.83,6143.38 3263.75,6159.46 cw(c3337.25,6232.95) 3233.31,6232.95 3233.31,6423.63 cw(c3337.25,6423.63) 3263.75,6497.12 3410.54,6643.91 cw(c3484.04,6570.41) 3484.04,6674.35 3544.79,6674.35 ccw(c3544.79,6727.9) 3582.65,6690.03 3634.95,6742.33 ccw(c3597.09,6780.2) 3650.63,6780.2 3650.63,6840.95 cw(c3754.57,6840.95) 3681.08,6914.44 3683.38,6916.74 ccw(c3645.52,6954.6) 3699.06,6954.6 3699.06,9897.97 ccw(c3606.15,9897.97) 3606.15,9990.89 2169.14,9990.89 ccw(c2169.14,9897.97) 2076.23,9897.97 2076.23,9365.68 cw(c1972.29,9365.68) 2051.91,9298.87 1319.6,8426.13 ccw(c1360.61,8391.71) 1313.56,8366.16 1333.4,8329.62 cw(c1242.06,8280.02) 1333.4,8230.43 985.12,7588.98 ccw(c1066.78,7544.64) 973.86,7544.64 973.86,4495.4 ; 1689.48,5470.1 ccw(c1793.22,5470.1) 1726.53,5390.63 1942.68,5209.26 ccw(c2009.37,5288.73) 2061.24,5198.89 2693.45,5563.89 ccw(c2641.58,5653.74) 2745.32,5653.74 2745.32,6386.31 ccw(c2641.58,6386.31) 2693.45,6476.15 2061.24,6841.16 ccw(c2009.37,6751.31) 1942.68,6830.78 1726.53,6649.41 ccw(c1793.22,6569.94) 1689.48,6569.94 1689.48,5470.1 ; 2103.98,3339.32 cw(c2227.91,3459.51) 2351.84,3579.69 2599.43,3324.39 cw(c2475.5,3204.21) 2351.56,3084.02 2103.98,3339.32 ; 2103.98,8700.72 ccw(c2227.91,8580.54) 2351.84,8460.35 2599.43,8715.65 ccw(c2475.5,8835.84) 2351.56,8956.02 2103.98,8700.72 ; 2170.58,4165.98 ccw(c2274.32,4165.66) 2200.96,4092.3 2367.4,3925.86 ccw(c2440.76,3999.22) 2441.08,3895.48 2574.36,3895.89 ccw(c2574.04,3999.63) 2665.07,3949.86 2964.21,4496.95 ccw(c2873.19,4546.72) 2946.54,4620.07 2895.17,4671.44 ccw(c2821.82,4598.09) 2772.05,4689.11 2224.96,4389.96 ccw(c2274.73,4298.94) 2170.99,4299.26 2170.58,4165.98 ; 2170.58,7874.07 cw(c2274.32,7874.38) 2200.96,7947.74 2367.4,8114.18 cw(c2440.76,8040.83) 2441.08,8144.56 2574.36,8144.16 cw(c2574.04,8040.42) 2665.07,8090.19 2964.21,7543.1 cw(c2873.19,7493.33) 2946.54,7419.97 2895.17,7368.6 cw(c2821.82,7441.96) 2772.05,7350.93 2224.96,7650.08 cw(c2274.73,7741.1) 2170.99,7740.78 2170.58,7874.07
Mechanical 6:
  the board outline again, w0.5
Mechanical 8:
  drawing of 231 lines, arcs and shapes, not listed